# Altium PCB POWERDI-5_L5.4-W4.0-LS6.5-RD.pcbdoc
Units mm, origin at the board's own origin, x right, y up, seen from the top; angles counter-clockwise.
Board outline 20.35 x 17.17 mm, 2 copper layers (Top Layer, Bottom Layer); 1 components, 0 nets, 3 pads, 0 vias.
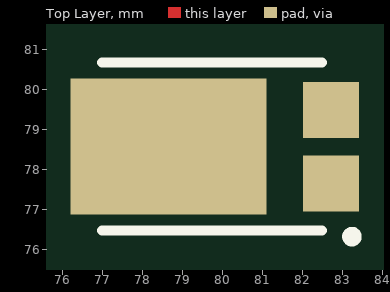
[diagram p0: Top Layer view]
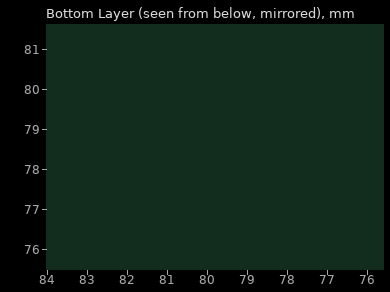
[diagram p1: Bottom Layer view, seen from below]

## Layer stack, top to bottom
Top Layer: signal copper (thickness not stored)
Dielectric: dielectric 0.32, FR-4, Dk 4.8
Bottom Layer: signal copper (thickness not stored)

## Board outline
90.203,69.85 69.85,69.85 69.85,87.017 90.203,87.017

## Components (designator, comment, footprint, x,y, rotation, side; value= is the part's Value field where it differs from the comment)
? "POWERDI-5_L5.4-W4.0-LS6.5-RD" POWERDI-5_L5.4-W4.0-LS6.5-RD 80.682,78.567 r0 top

## Footprints (in the part's own frame and the unit in brackets; to place one, negate y for a bottom-side part, rotate by r counter-clockwise, add the part's x,y. Pads: shape width x height; smd on the part's side, far side on the other; paste and mask are expansions set on the pad)
POWERDI-5_L5.4-W4.0-LS6.5-RD [mm]
  rect 1.4x1.4 smd: 1(2.032,-0.92) 2(2.032,0.92)
  rect 4.9x3.4 smd: 3(-2.032,0)
  silkscreen extent -3.7,-2.37 2.67,2.1

## Nets (pads, with @x,y where several pads share a name; then routed paths per layer and width w, separated by ;. In a path a pad name is that pad's centre, name@x,y a point inside that pad or via, vN(x,y) a via of type N, cw(c..) or ccw(c..) an arc to the next point about the centre after c; other vN are vias at no path point)
pads on no net: ?.1 ?.2 ?.3